# Altium PCB v2.PcbDoc
Units mm, origin at the board's own origin, x right, y up, seen from the top; angles counter-clockwise.
Board outline 56.52 x 36.2 mm, 2 copper layers (Top Layer, Bottom Layer); 11 components, 22 nets, 68 pads, 3 vias.
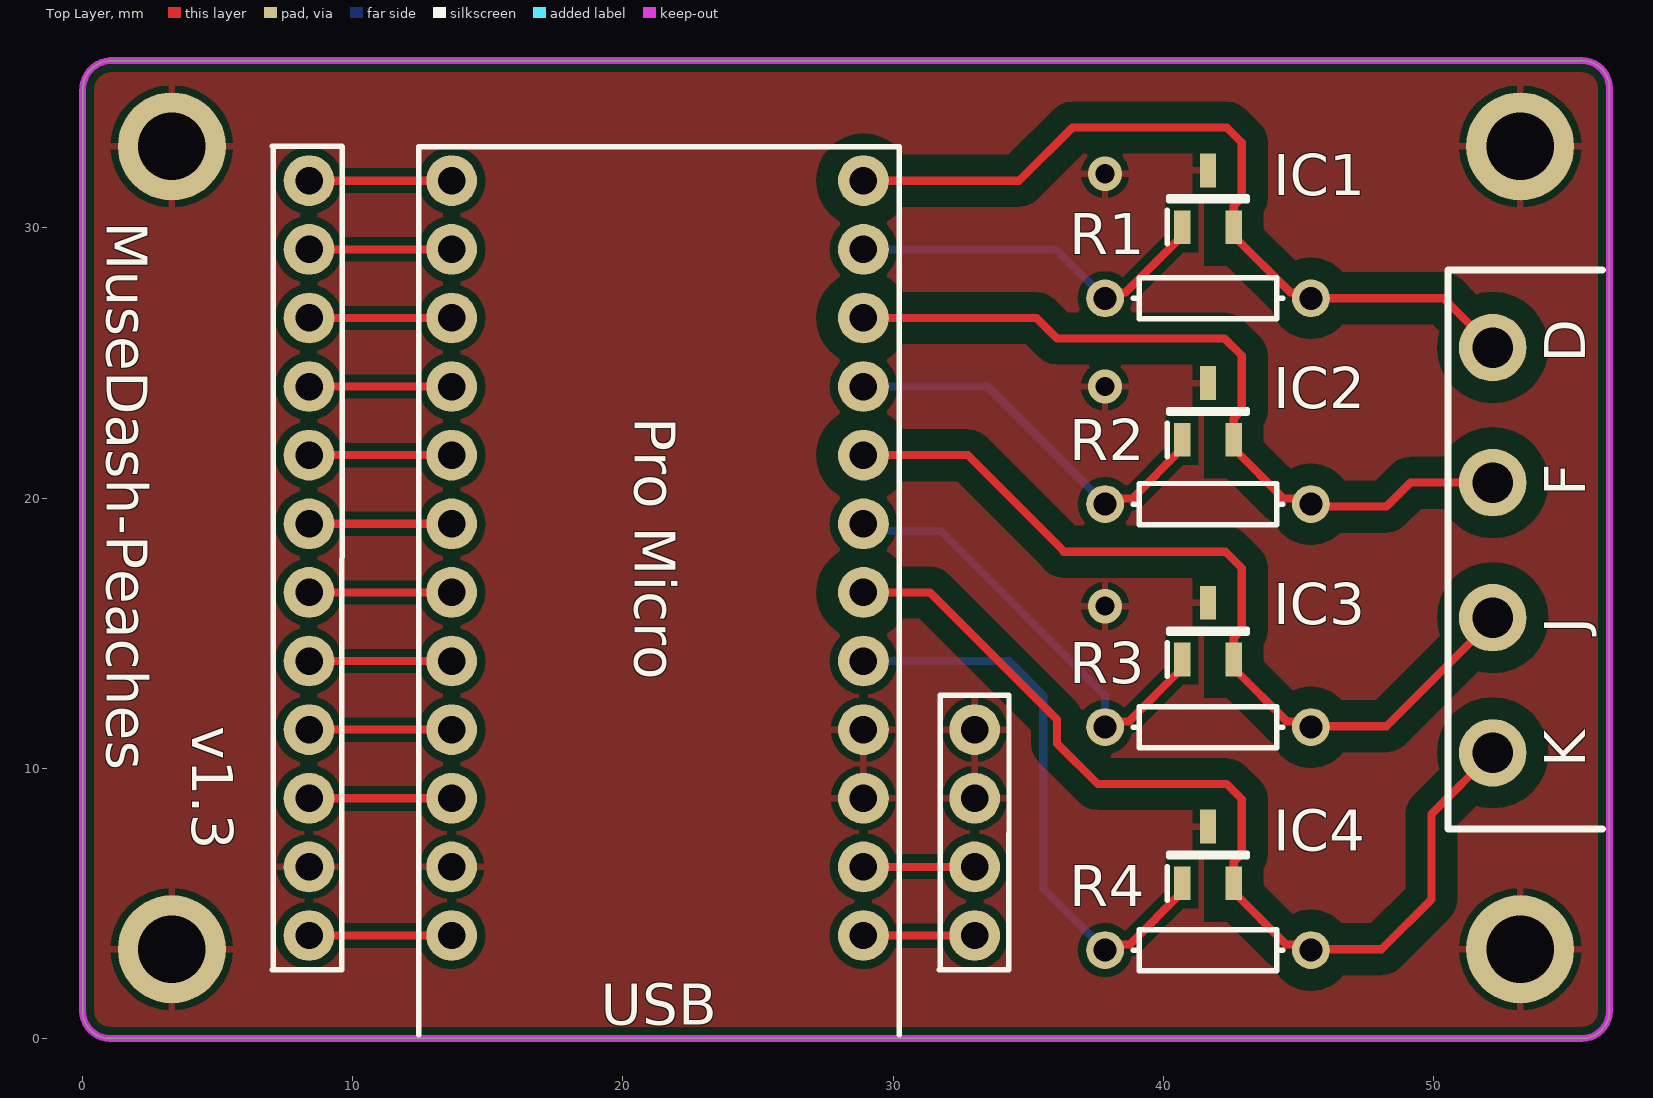
[diagram p0: Top Layer view]
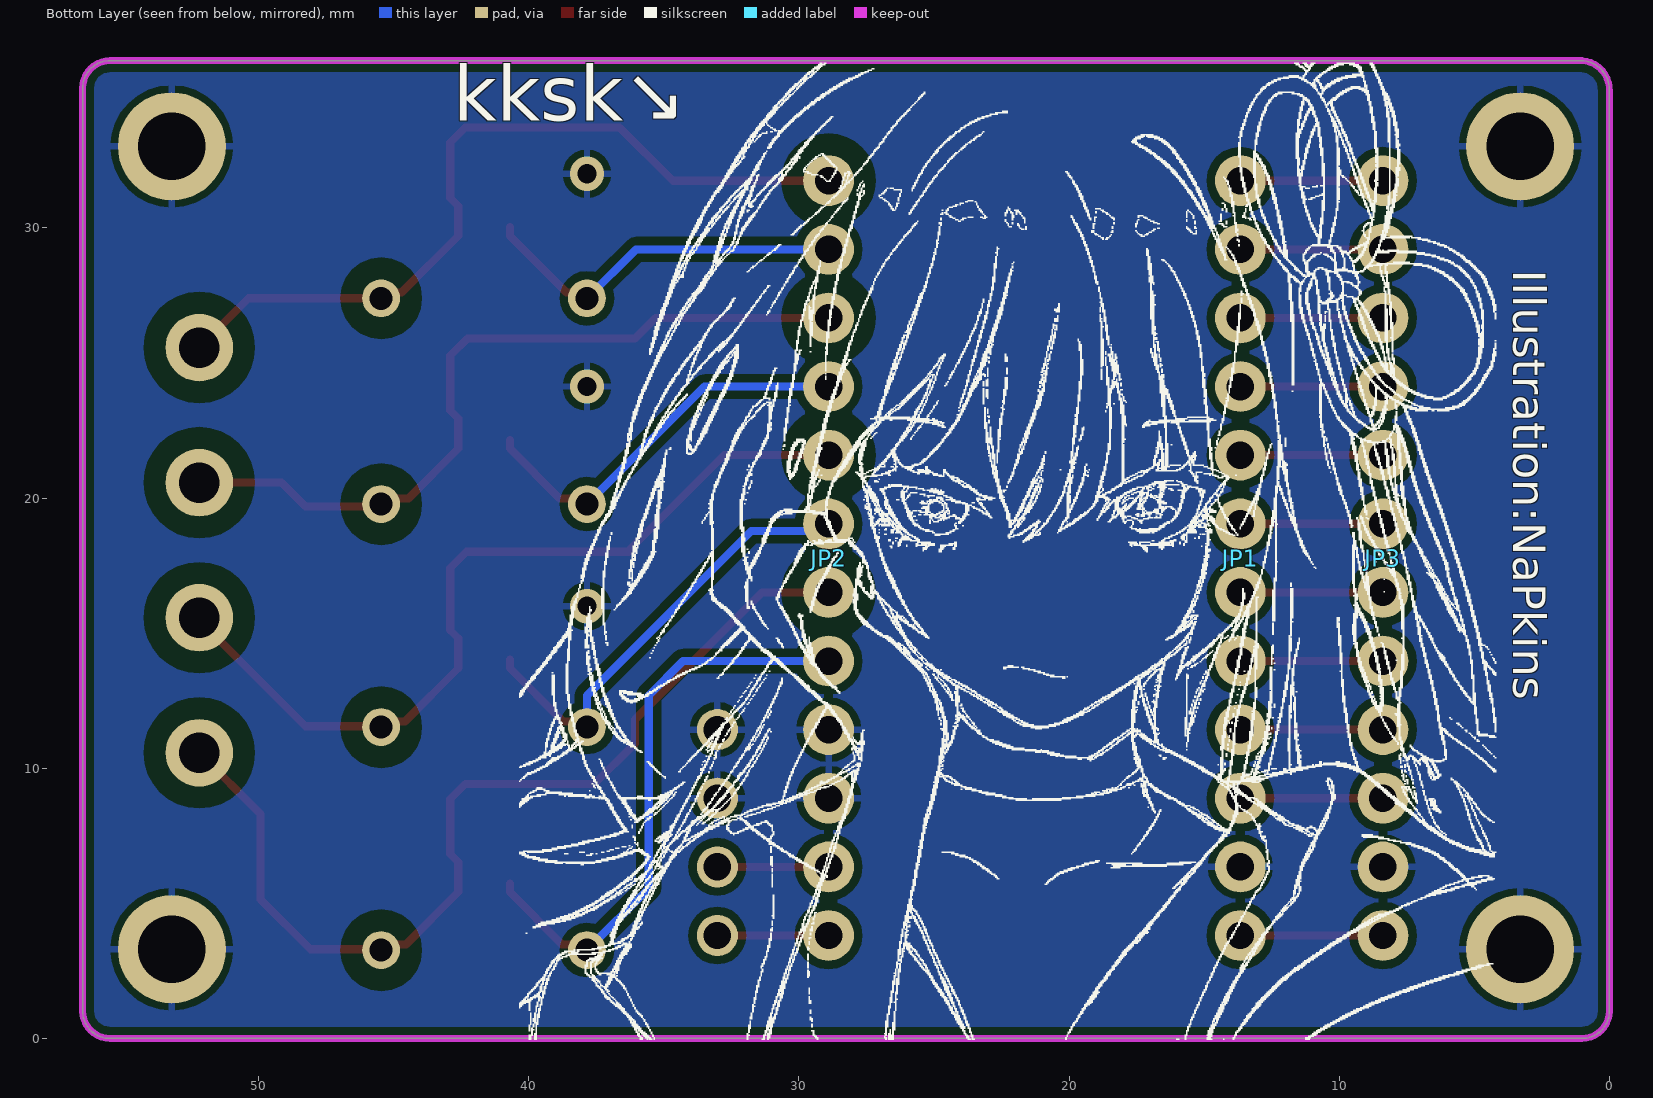
[diagram p1: Bottom Layer view, seen from below]
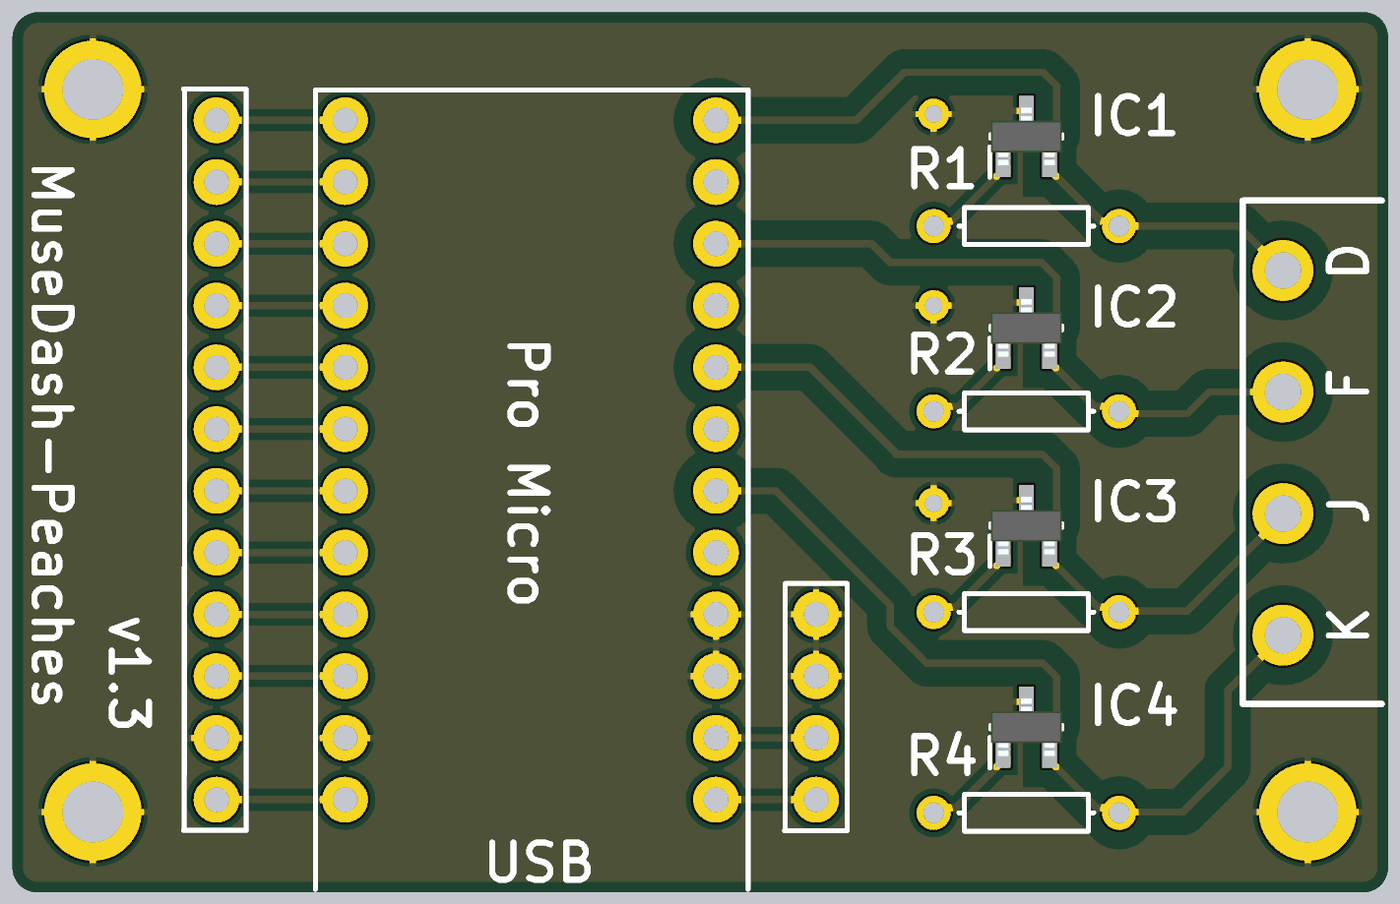
[diagram p2: 3D render of the assembled board from above, using the file's embedded part models]

## Layer stack, top to bottom
Top Solder: solder mask 0.0102, Solder Resist, Dk 3.5
Top Layer: signal copper 0.0356
Dielectric 1: dielectric 0.32, FR-4, Dk 4.8
Bottom Layer: signal copper 0.0356
Bottom Solder: solder mask 0.0102, Solder Resist, Dk 3.5

## Board outline
1.016,0 cw(c1.016,1.016) 0,1.016 0,35.052 cw(c1.079,35.115) 1.016,36.195 55.499,36.195 cw(c55.499,35.179) 56.515,35.179 56.515,1.016 cw(c55.499,1.016) 55.499,0

## Design rules (kind name [scope] priority, off if disabled: settings)
Clearance Clearance_1 [InNet('GND') vs InNetClass('New Class')] p1: gap=0.8 ignorepadtopadclearanceinfootprint=FALSE
Clearance [All] p2: gap=0.3 ignorepadtopadclearanceinfootprint=FALSE
PolygonConnect [All] p1: connectstyle=Relief reliefconductorwidth=0.254 reliefentries=4 polygonreliefangle="90 Angle" airgapwidth=0.254
RoutingVias [All] p1: holewidth=0.711 width=1.27 viastyle="Through Hole" minholewidth=0.711 minwidth=1.27 maxholewidth=0.711 maxwidth=1.27
SolderMaskExpansion [All] p1: expansion=0.102
Width [All] p1: maxlimit=0.4 minlimit=0.254 preferedwidth=0.3 minimp=50.000000 maximp=50.000000 favimp=50.000000
30 further rules are at their usual default settings.

## Classes and differential pairs
net class "New Class": "Key \"D\"" "Key \"F\"" "Key \"J\"" "Key \"K\""
component class v2: IC1 IC2 IC3 IC4 R1 R2 R3 R4

## Components (designator, comment, footprint, x,y, rotation, side; value= is the part's Value field where it differs from the comment)
IC1 "NUP2105LT1G" SOT96P237X111-3N 41.656,31.081 r90 top
IC2 "NUP2105LT1G" SOT96P237X111-3N 41.656,23.207 r90 top
IC3 "NUP2105LT1G" SOT96P237X111-3N 41.656,15.079 r90 top
IC4 "NUP2105LT1G" SOT96P237X111-3N 41.656,6.79 r90 top
JP1 "" 1X12 13.662,31.75 r270 bottom locked (schematic designator D1)
JP2 "" 1X12 28.902,3.81 r90 bottom locked (schematic designator D2)
JP3 "" 1X12 8.382,31.75 r270 bottom (schematic designator D1)
R1 "Res1" AXIAL-0.3 41.656,27.398 r0 top value=1M
R2 "Res1" AXIAL-0.3 41.656,19.778 r0 top value=1M
R3 "Res1" AXIAL-0.3 41.656,11.523 r0 top value=1M
R4 "Res1" AXIAL-0.3 41.656,3.268 r0 top value=1M

## Footprints (in the part's own frame and the unit in brackets; to place one, negate y for a bottom-side part, rotate by r counter-clockwise, add the part's x,y. Pads: shape width x height; smd on the part's side, far side on the other; paste and mask are expansions set on the pad)
1X12 [mil] "1X12"
  round 74 / inner round 60 / far side round 74 hole 40: 1(0,0) 2(100,0) 3(200,0) 4(300,0) 5(400,0) 6(500,0) 7(600,0) 8(700,0) 9(800,0) 10(900,0) 11(1000,0) 12(1100,0)
AXIAL-0.3 [mm] "Axial Device, Thru-Hole; 2 Leads; 0.3 in Pin Spacing"
  round 1.4 hole 0.85: 1(-3.81,0) 2(3.81,0)
  silkscreen extent -2.77,-0.76 2.77,0.76
SOT96P237X111-3N [mm]
  rect 1.25x0.6 smd: 1(-1.05,0.955) 2(-1.05,-0.955) 3(1.05,0)
  silkscreen extent -1.67,-1.46 0.07,1.51, body extent -1.18,-1.46 1.18,1.46, height 1.11

## Part data
IC1 IC2 IC3 IC4: "Integrated Circuit", Manufacturer_Name="ON Semiconductor", Mouser Part Number=863-NUP2105LT1G, Arrow Part Number=NUP2105LT1G, Arrow Price/Stock=https://www.arrow.com/en/products/nup2105lt1g/on-semiconductor, Datasheet Link=https://www.onsemi.com/pub/Collateral/NUP2105L-D.PDF, Height=1.11mm, Manufacturer_Part_Number=NUP2105LT1G, Mouser Price/Stock=https://www.mouser.co.uk/ProductDetail/ON-Semiconductor/NUP2105LT1G?qs=ZXBb0xZ9WeDHmiHN%252BYKtYA%3D%3D
JP1 JP2 JP3: library part SMBJ5.0CA, "TVS DIODE 5V 9.2V SMB", PackageName=1X12
R1 R2 R3 R4: "Resistor", LatestRevisionDate=17-Jul-2002, LatestRevisionNote="Re-released for DXP Platform.", PackageDescription="Axial Device, Thru-Hole; 2 Leads; 0.3 in Pin Spacing", PackageReference=AXIAL-0.3, Published=8-Jun-2000, Publisher="Altium Limited"

## Free pads (board coordinates)
  round 1.88 / inner round 1.524 / far side round 1.524 hole 1.016: 1(33.02,3.81) 2(33.02,6.35) 3(33.02,8.89) 4(33.02,11.43)
  round 2.5 hole 1.5: D(52.197,25.574) F(52.197,20.574) J(52.197,15.574) K(52.197,10.574)
  round 4 hole 2.5: ""(3.302,3.302) ""(3.302,33.02) ""(53.213,3.302) ""(53.213,33.02)

## Via types
v1: diameter 1.27, hole 0.711, Top Layer to Bottom Layer, 3 vias

## Nets (pads, with @x,y where several pads share a name; then routed paths per layer and width w, separated by ;. In a path a pad name is that pad's centre, name@x,y a point inside that pad or via, vN(x,y) a via of type N, cw(c..) or ccw(c..) an arc to the next point about the centre after c; other vN are vias at no path point)
1: JP1.1 JP3.1 | length 5.3
  Top Layer w0.3: JP3.1 JP1.1
2: JP1.2 JP3.2 | length 5.3
  Top Layer w0.3: JP3.2 JP1.2
3: JP1.3 JP3.3 | length 5.3
  Top Layer w0.3: JP3.3 JP1.3
4: JP1.4 JP3.4 | length 5.3
  Top Layer w0.3: JP3.4 JP1.4
5: JP1.5 JP3.5 | length 5.3
  Top Layer w0.3: JP3.5 JP1.5
6: JP1.6 JP3.6 | length 5.3
  Top Layer w0.3: JP3.6 JP1.6
7: JP1.7 JP3.7 | length 5.3
  Top Layer w0.3: JP3.7 JP1.7
8: JP1.8 JP3.8 | length 5.3
  Top Layer w0.3: JP3.8 JP1.8
9: JP1.9 JP3.9 | length 5.3
  Top Layer w0.3: JP3.9 JP1.9
10: JP1.10 JP3.10 | length 5.3
  Top Layer w0.3: JP3.10 JP1.10
12: JP1.12 JP3.12 | length 5.3
  Top Layer w0.3: JP3.12 JP1.12
13: JP2.2 pad.2 | length 4.1
  Top Layer w0.3: JP2.2 pad.2
14: JP2.1 pad.1 | length 4.1
  Top Layer w0.3: JP2.1 pad.1
GND: IC1.3 IC2.3 IC3.3 IC4.3 JP1.11 JP2.3 JP2.4 JP3.11 pad. pad.3 pad.4
  other v1: 37.846,16.002 37.846,24.13 37.846,32.004
"Key \"D\"": IC1.2 JP2.12 pad.D R1.2 | length 29.9
  Top Layer w0.3: JP2.12 34.667,31.75 36.638,33.72 42.353,33.72 42.906,33.167 42.906,31.112 42.611,30.817 IC1.2 42.611,29.706 44.709,27.608 45.256,27.608 R1.2 50.373,27.398 pad.D
"Key \"F\"": IC2.2 JP2.10 pad.F R2.2 | length 29
  Top Layer w0.3: JP2.10 35.302,26.67 36.064,25.908 42.274,25.908 42.906,25.276 42.906,23.238 42.611,22.943 IC2.2 42.611,21.832 44.455,19.988 45.256,19.988 R2.2 45.559,19.685 48.26,19.685 49.149,20.574 pad.F
"Key \"J\"": IC3.2 JP2.8 pad.J R3.2 | length 31.8
  Top Layer w0.3: JP2.8 32.766,21.59 36.322,18.034 36.302,18.014 42.311,18.014 42.906,17.419 42.906,15.11 42.611,14.815 IC3.2 42.611,13.704 44.582,11.733 45.256,11.733 R3.2 45.5,11.557 48.26,11.557 52.197,15.494 pad.J
"Key \"K\"": IC4.2 JP2.6 pad.K R4.2 | length 36.6
  Top Layer w0.3: JP2.6 31.369,16.51 36.068,11.811 36.068,10.922 37.575,9.415 42.35,9.415 42.906,8.859 42.906,6.822 42.611,6.527 IC4.2 42.611,5.415 44.548,3.478 45.256,3.478 R4.2 45.5,3.302 48.084,3.302 49.93,5.148 49.93,8.307 pad.K
"pin D2": IC4.1 JP2.5 R4.1 | length 21.8
  Top Layer w0.3: JP2.5 JP2.5@28.965,13.906 ; R4.1 38.056,3.478 38.764,3.478 40.701,5.415 IC4.1
  Bottom Layer w0.3: JP2.5@28.965,13.906 JP2.5 34.29,13.97 35.56,12.7 35.56,5.554 R4.1
"pin D4": IC3.1 JP2.7 R3.1 | length 16.8
  Top Layer w0.3: R3.1 38.056,11.733 38.73,11.733 40.701,13.704 IC3.1
  Bottom Layer w0.3: JP2.7 29.172,18.78 31.766,18.78 37.846,12.7 R3.1
"pin D6": IC2.1 JP2.9 R2.1 | length 14.8
  Top Layer w0.3: R2.1 38.056,19.988 38.857,19.988 40.701,21.832 IC2.1
  Bottom Layer w0.3: JP2.9 33.494,24.13 R2.1
"pin D8": IC1.1 JP2.11 R1.1 | length 13.8
  Top Layer w0.3: R1.1 38.056,27.608 38.603,27.608 40.701,29.706 IC1.1
  Bottom Layer w0.3: JP2.11 36.034,29.21 R1.1

## Polygon pours and split planes (outlines as drawn)
GND on Bottom Layer (solid, pour order 57): 0,36.195 56.515,36.195 56.515,0 0,0
GND on Bottom Layer "GND_L02_P002" (solid, pour order 2): 0,36.195
GND on Top Layer (solid, pour order 55): 0,36.195 56.515,36.195 56.515,0 0,0
no net on Top Layer "NONET_L01_P016" (solid, pour order 16): 0,36.195
GND on Top Layer "GND_L01_P012" (solid, pour order 12): 0.127,35.941
no net on Top Layer "NONET_L01_P005" (solid, pour order 5): 0,36.195

## Keep-outs
Keep-Out Layer:
  the board outline again, w0.254

## Silkscreen, mask and mechanical layers (free items; w line width, h text height)
Top Overlay:
  lines w0.203: 7.026,2.55 9.6,2.55 ; 7.026,33.03 9.6,33.03 ; 7.06,2.548 7.063,33.008 ; 9.6,2.548 9.603,33.008 ; 12.442,0.127 12.442,33 30.222,33 30.222,0.127 ; 31.717,2.54 34.29,2.54 ; 31.75,2.537 31.751,12.7 34.291,12.7 34.29,2.537
  lines w0.254: 56.261,7.747 50.546,7.747 50.546,28.448 56.261,28.448
  text "MuseDash-Peaches" at 0.889,30.226 h1.52 r270
  text "D" at 55.626,25.019 h1.52 r90
  text "Pro Micro" at 20.447,22.987 h1.52 r270
  text "F" at 55.626,20.066 h1.52 r90
  text "J" at 55.626,14.986 h1.52 r90
  text "v1.3" at 4.064,11.557 h1.52 r270
  text "K" at 55.626,10.033 h1.52 r90
  text "USB" at 19.177,0.508 h1.52
Bottom Overlay:
  drawing of 20220 lines, arcs and shapes, not listed
  text "kksk↘" at 42.796,33.312 h3.5
  text "Illustration:NaPkins" at 3.556,28.448 h1.2 r90